# Altium PCB Test.PcbDoc
Units mil, origin at the board's own origin, x right, y up, seen from the top; angles counter-clockwise.
Board outline 6000 x 4000 mil, 2 copper layers (Top Layer, Bottom Layer); 78 components, 0 nets, 420 pads, 5 vias.
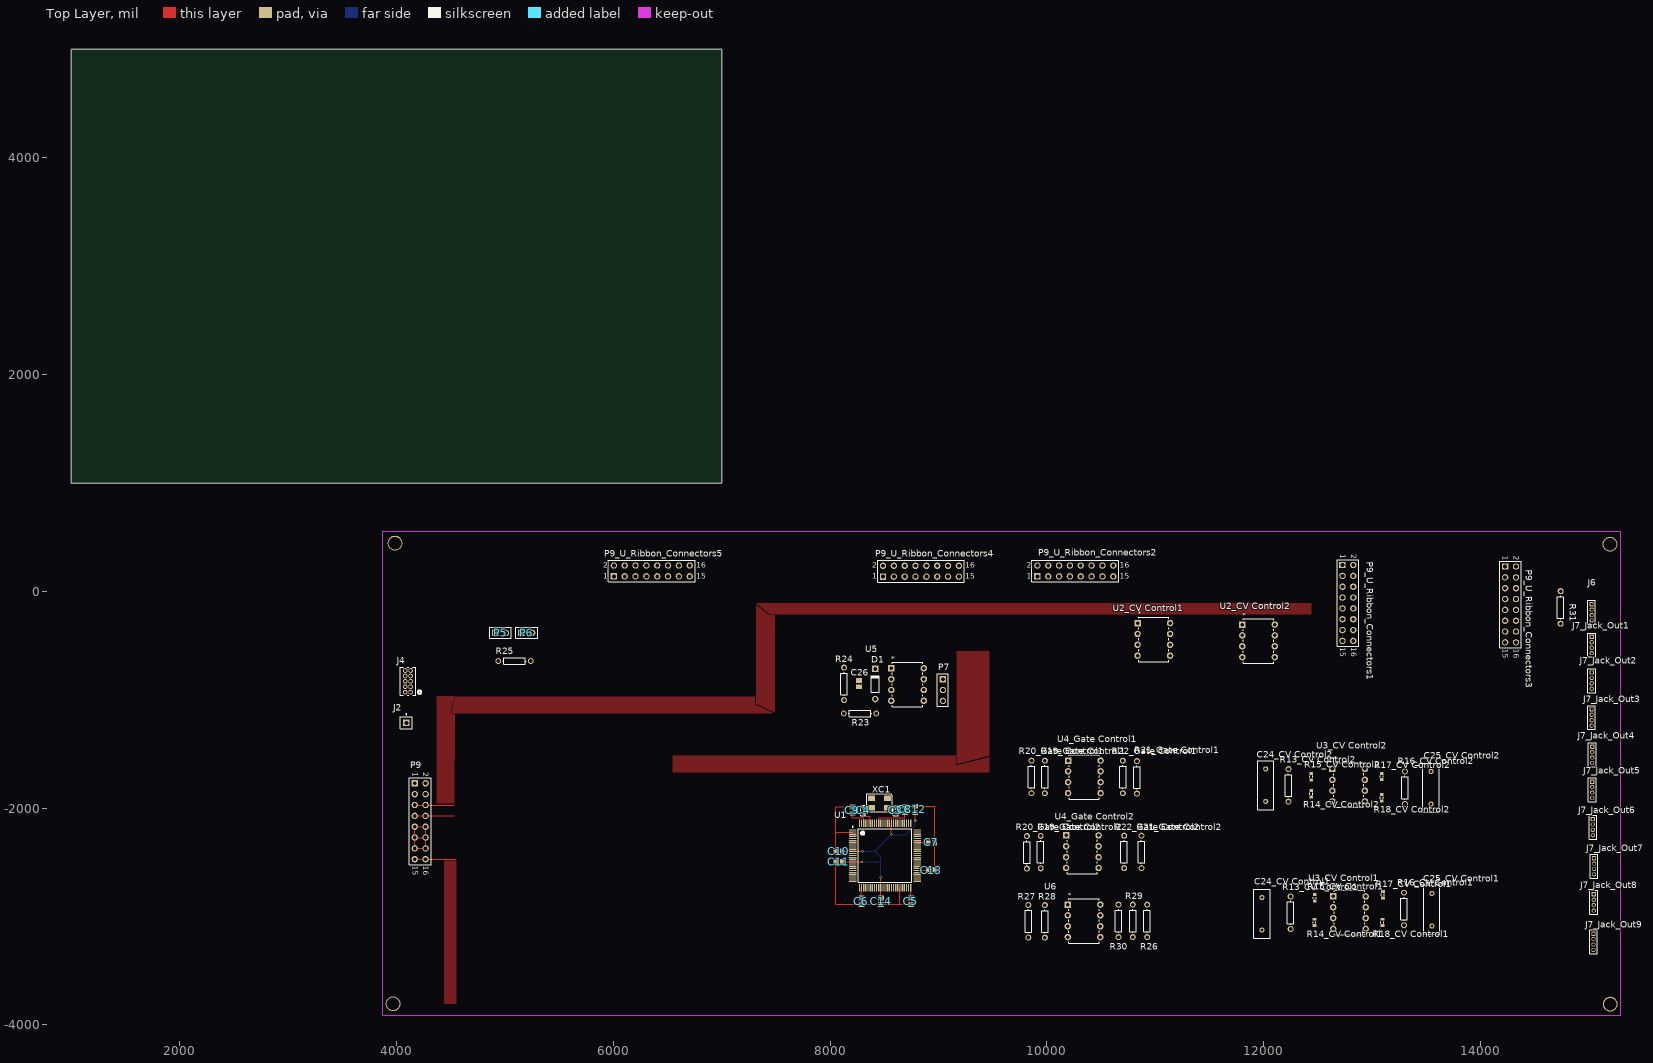
[diagram p0: Top Layer view]
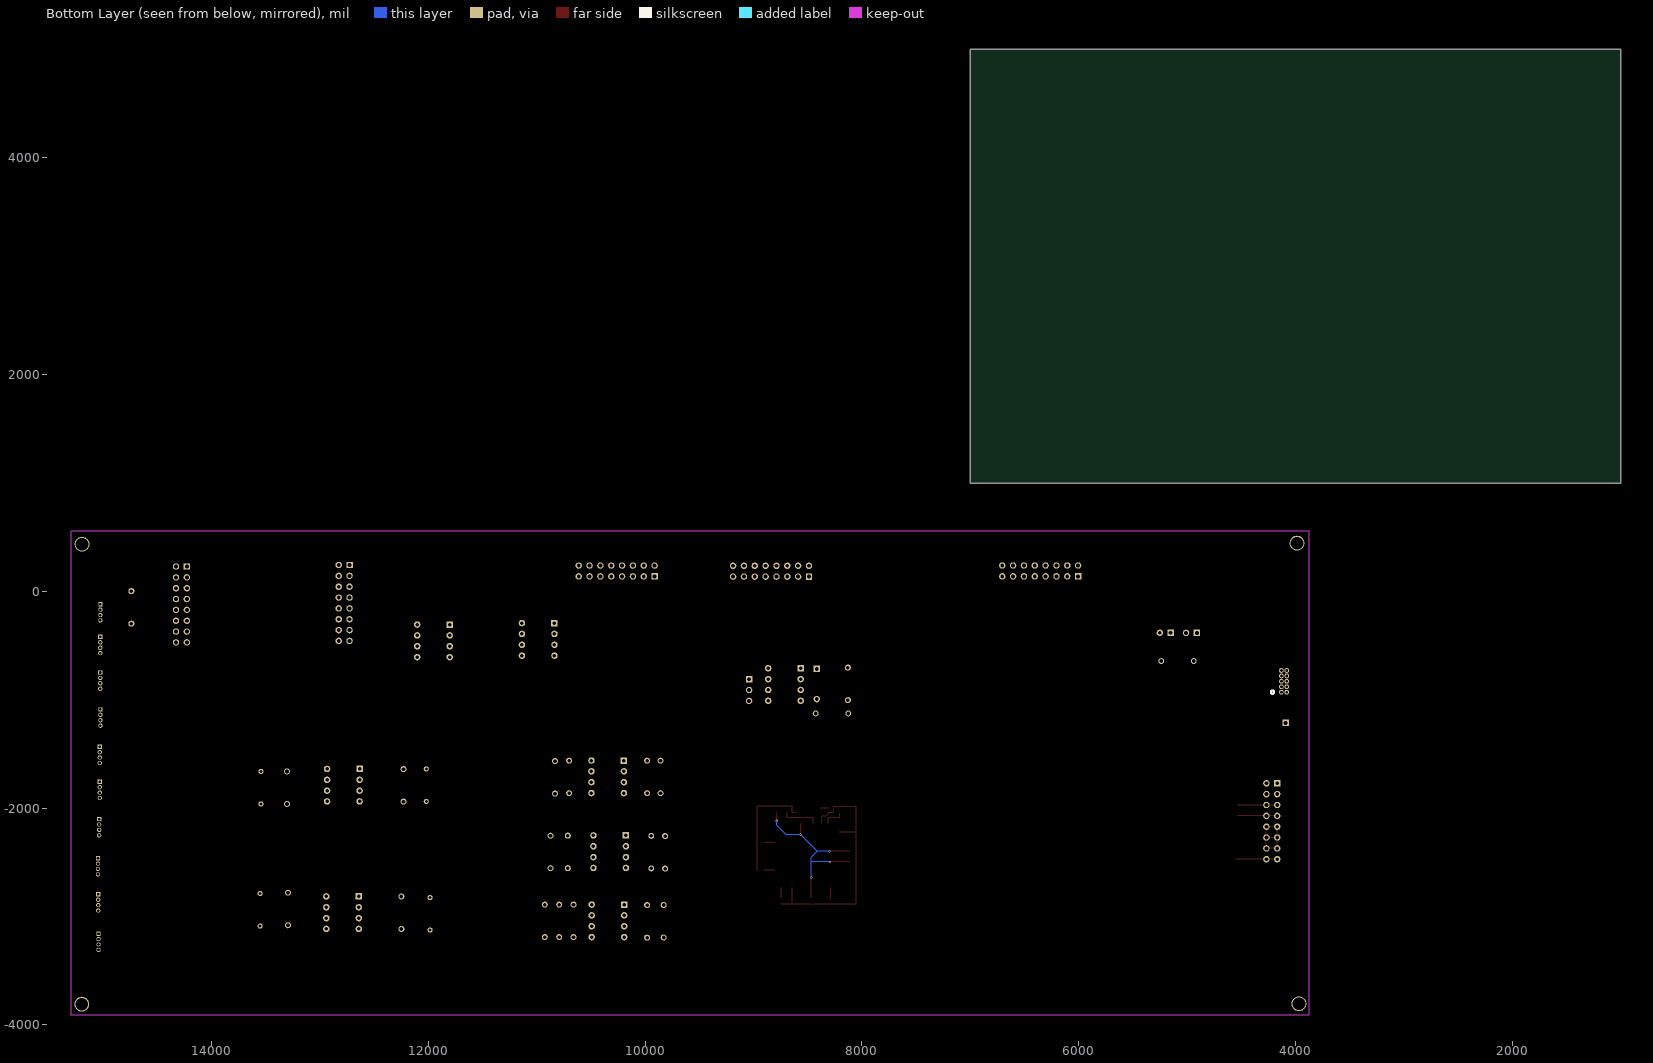
[diagram p1: Bottom Layer view, seen from below]

## Layer stack, top to bottom
Top Solder: solder mask 0.4, Solder Resist, Dk 3.5
Top Layer: signal copper 1.4
Dielectric 1: dielectric 12.6, FR-4, Dk 4.8
Bottom Layer: signal copper 1.4
Bottom Solder: solder mask 0.4, Solder Resist, Dk 3.5

## Board outline
1000,1000 7000,1000 7000,5000 1000,5000

## Design rules (kind name [scope] priority, off if disabled: settings)
Clearance [All] p1: gap=10
PolygonConnect [All] p1: connectstyle=Relief reliefconductorwidth=10 reliefentries=4 polygonreliefangle="90 Angle" airgapwidth=10
RoutingVias [All] p1: holewidth=28 width=50 viastyle="Through Hole" minholewidth=28 minwidth=50 maxholewidth=28 maxwidth=50
SolderMaskExpansion [All] p1: expansion=4
Width [All] p1: maxlimit=10 minlimit=10 preferedwidth=10
30 further rules are at their usual default settings.

## Components (designator, comment, footprint, x,y, rotation, side; value= is the part's Value field where it differs from the comment)
C3 "CAP-NONPOL" AP1-00001 8605.55,-2020.59 r270 top
C4 "CAP-NONPOL" AP1-00001 8303.39,-2020.59 r90 top
C5 "" C0805 8745.31,-2858.19 r90 top
C6 "" C0805 8288.62,-2858.19 r90 top
C7 "" C0805 8934.29,-2315.87 r180 top
C8 "" C0805 8688.23,-2011.73 r270 top
C9 "" C0805 8203.98,-2017.64 r270 top
C10 "" C0805 8080.94,-2397.56 r0 top
C11 "" C0805 8080.94,-2495.98 r0 top
C12 "" C0805 8784.68,-2011.73 r270 top
C13 "" C0805 8934.29,-2571.77 r180 top
C14 "" C0805 8469.72,-2858.19 r90 top
"C24_CV Control1" "Cap" RAD-0.3 11982.52,-2974.33 r90 top (schematic designator C24)
"C24_CV Control2" "Cap" RAD-0.3 12017.95,-1787.32 r270 top (schematic designator C24)
"C25_CV Control1" "Cap" RAD-0.3 13550.43,-2936.93 r270 top (schematic designator C25)
"C25_CV Control2" "Cap" RAD-0.3 13542.56,-1810.94 r270 top (schematic designator C25)
C26 "" C0805 8265.16,-851.38 r270 top
D1 "Diode 1N4148" DO-35 8415.59,-854.25 r90 top
J2 "Erase_Socket" PIN1 4089.8,-1212.52 r0 top
J4 "20021111-00010T4" CONN_MINITEK_2X5 4104.57,-829.65 r90 top
J6 "Phonejack3 RN" MHDR1X4 15023.86,-118.03 r270 top
J7_Jack_Out1 "Phonejack3 RN" MHDR1X4 15024.84,-419.21 r270 top (schematic designator J7)
J7_Jack_Out2 "Phonejack3 RN" MHDR1X4 15024.84,-747.95 r270 top (schematic designator J7)
J7_Jack_Out3 "Phonejack3 RN" MHDR1X4 15023.86,-1088.5 r270 top (schematic designator J7)
J7_Jack_Out4 "Phonejack3 RN" MHDR1X4 15029.76,-1432.99 r270 top (schematic designator J7)
J7_Jack_Out5 "Phonejack3 RN" MHDR1X4 15029.76,-1755.83 r270 top (schematic designator J7)
J7_Jack_Out6 "Phonejack3 RN" MHDR1X4 15035.67,-2100.31 r270 top (schematic designator J7)
J7_Jack_Out7 "Phonejack3 RN" MHDR1X4 15046.5,-2460.55 r270 top (schematic designator J7)
J7_Jack_Out8 "Phonejack3 RN" MHDR1X4 15044.53,-2794.21 r270 top (schematic designator J7)
J7_Jack_Out9 "Phonejack3 RN" MHDR1X4 15041.57,-3157.4 r270 top (schematic designator J7)
P5 "Header 2" HDR1X2 4908.7,-382.8 r0 top
P6 "Header 2" HDR1X2 5150.83,-381.81 r0 top
P7 "Header 3" HDR1X3 9039.77,-810.04 r270 top
P9 "Header 8X2" HDR2X8 4167.56,-1770.59 r270 top
P9_U_Ribbon_Connectors1 "Header 8X2" HDR2X8 12725.63,243.19 r270 top (schematic designator P9)
P9_U_Ribbon_Connectors2 "Header 8X2" HDR2X8 9911.46,138.27 r0 top (schematic designator P9)
P9_U_Ribbon_Connectors3 "Header 8X2" HDR2X8 14226.61,229.41 r270 top (schematic designator P9)
P9_U_Ribbon_Connectors4 "Header 8X2" HDR2X8 8487.24,136.3 r0 top (schematic designator P9)
P9_U_Ribbon_Connectors5 "Header 8X2" HDR2X8 6004.17,138.86 r0 top (schematic designator P9)
"R13_CV Control1" "Res1" AXIAL-0.3 12247.28,-2964.49 r90 top (schematic designator R13)
"R13_CV Control2" "Res1" AXIAL-0.3 12227.6,-1789.29 r270 top (schematic designator R13)
"R14_CV Control1" "Res3" J1-0603 12467.76,-3054.05 r270 top (schematic designator R14)
"R14_CV Control2" "Res3" J1-0603 12438.23,-1867.05 r270 top (schematic designator R14)
"R15_CV Control1" "Res3" J1-0603 12470.71,-2827.68 r270 top (schematic designator R15)
"R15_CV Control2" "Res3" J1-0603 12438.23,-1708.58 r270 top (schematic designator R15)
"R16_CV Control1" "Res1" AXIAL-0.3 13293.54,-2930.04 r270 top (schematic designator R16)
"R16_CV Control2" "Res1" AXIAL-0.3 13302.4,-1810.94 r270 top (schematic designator R16)
"R17_CV Control1" "Res3" J1-0603 13098.66,-2799.13 r270 top (schematic designator R17)
"R17_CV Control2" "Res3" J1-0603 13088.82,-1707.6 r90 top (schematic designator R17)
"R18_CV Control1" "Res3" J1-0603 13093.74,-3054.05 r270 top (schematic designator R18)
"R18_CV Control2" "Res3" J1-0603 13088.82,-1903.46 r270 top (schematic designator R18)
"R19_Gate Control1" "Res1" AXIAL-0.3 9980.55,-1711.54 r90 top (schematic designator R19)
"R19_Gate Control2" "Res1" AXIAL-0.3 9942.33,-2405.51 r90 top (schematic designator R19)
"R20_Gate Control1" "Res1" AXIAL-0.3 9856.54,-1711.54 r270 top (schematic designator R20)
"R20_Gate Control2" "Res1" AXIAL-0.3 9814.38,-2407.48 r270 top (schematic designator R20)
"R21_Gate Control1" "Res1" AXIAL-0.3 10829.96,-1715.47 r270 top (schematic designator R21)
"R21_Gate Control2" "Res1" AXIAL-0.3 10871.46,-2403.54 r270 top (schematic designator R21)
"R22_Gate Control1" "Res1" AXIAL-0.3 10700.04,-1711.54 r90 top (schematic designator R22)
"R22_Gate Control2" "Res1" AXIAL-0.3 10712.01,-2403.54 r90 top (schematic designator R22)
R23 "Res1" AXIAL-0.3 8275.01,-1125.98 r0 top
R24 "Res1" AXIAL-0.3 8128.35,-853.35 r270 top
R25 "R3" AXIAL-0.3 5087.83,-642.64 r0 top
R26 "Res1" AXIAL-0.3 10924.45,-3039.29 r270 top
R27 "Res1" AXIAL-0.3 9827.99,-3043.23 r270 top
R28 "Res1" AXIAL-0.3 9980.55,-3044.21 r90 top
R29 "Res1" AXIAL-0.3 10791.57,-3039.29 r270 top
R30 "Res1" AXIAL-0.3 10659.68,-3039.29 r270 top
R31 "Res1" AXIAL-0.3 14738.43,-147.56 r90 top
U1 "ATSAM4N16CA-AU" LQFP100_N 8506.14,-2436.93 r0 top net-tie
"U2_CV Control1" "LTC1661CN8#PBF" PDIP-8_N 11135.08,-592.44 r0 top (schematic designator U2)
"U2_CV Control2" "LTC1661CN8#PBF" PDIP-8_N 12101.61,-606.22 r0 top (schematic designator U2)
"U3_CV Control1" "LT1632CN8#PBF" PDIP-8_N 12940.2,-3114.09 r0 top (schematic designator U3)
"U3_CV Control2" "LT1632CN8#PBF" PDIP-8_N 12933.31,-1937.91 r0 top (schematic designator U3)
"U4_Gate Control1" "LT1632CN8#PBF" PDIP-8_N 10494.33,-1860.16 r0 top (schematic designator U4)
"U4_Gate Control2" "LT1632CN8#PBF" PDIP-8_N 10475.79,-2551.18 r0 top (schematic designator U4)
U5 "LT1632CN8#PBF" PDIP-8_N 8863.58,-1009.45 r0 top
U6 "LT1632CN8#PBF" PDIP-8_N 10492.36,-3188.9 r0 top
XC1 "12.0MHz" AP7-00039 8454.96,-1951.69 r180 top

## Footprints (in the part's own frame and the unit in brackets; to place one, negate y for a bottom-side part, rotate by r counter-clockwise, add the part's x,y. Pads: shape width x height; smd on the part's side, far side on the other; paste and mask are expansions set on the pad)
AP1-00001 [mm]
  rect 0.9x0.6 smd: 1(-0.55,0) 2(0.55,0)
  silkscreen extent -1.25,-0.55 1.25,0.55, body extent -0.5,-0.3 0.5,0.3, height 0.2
AP7-00039 [mm]
  rect 1.6x1.3 smd: 1(-1.9,-1.15) 2(1.9,-1.15) 3(1.9,1.15) 4(-1.9,1.15)
  silkscreen extent -3,-2.1 3,2.1, body extent -2.7,-1.8 2.7,1.8, height 1.2
AXIAL-0.3 [mm] "Axial Device, Thru-Hole; 2 Leads; 0.3 in Pin Spacing"
  round 1.4 hole 0.85: 1(-3.81,0) 2(3.81,0)
  silkscreen extent -2.77,-0.76 2.77,0.76
C0805 [mm] "Chip Capacitor, Body 2.0x1.3mm, IPC High Density"
  rect 1.1x1.4 smd: 1(-0.75,0) 2(0.75,0)
  body extent -1.1,-0.72 1.1,0.72, height 1.4
CONN_MINITEK_2X5 [mil]
  round 44 / inner round 60 / far side round 44 hole 26: 1(-100,-25) 2(-100,25) 3(-50,-25) 4(-50,25) 5(0,-25) 6(0,25) 7(50,-25) 8(50,25) 9(100,-25) 10(100,25)
  silkscreen extent -130,-122 130,73, body extent 0,0 10,10, height 10
DO-35 [mm] "Diode, Axial; Body 3.8 x 1.9 mm (LxDia. max), Lead Dia. 0.53 mm (max)"
  round 1.5 hole 0.9: 1(-3.55,0)
  rect 1.5x1.5 hole 0.9: 2(3.55,0)
  silkscreen extent -1.95,-0.95 2.05,0.95
HDR1X2 [mm] "Connector; Header; 2 Position"
  rect 1.5x1.5 hole 0.9: 1(0,0)
  round 1.5 hole 0.9: 2(2.54,0)
  silkscreen extent -1.27,-1.27 3.81,1.27
HDR1X3 [mm] "Connector; Header; 3 Position"
  rect 1.5x1.5 hole 0.9: 1(0,0)
  round 1.5 hole 0.9: 2(2.54,0) 3(5.08,0)
  silkscreen extent -1.27,-1.27 6.35,1.27
HDR2X8 [mm] "Connector; Header; 8x2 Position"
  rect 1.5x1.5 hole 0.9: 1(0,0)
  round 1.5 hole 0.9: 2(0,2.54) 3(2.54,0) 4(2.54,2.54) 5(5.08,0) 6(5.08,2.54) 7(7.62,0) 8(7.62,2.54) 9(10.16,0) 10(10.16,2.54) 11(12.7,0) 12(12.7,2.54) 13(15.24,0) 14(15.24,2.54) 15(17.78,0) 16(17.78,2.54)
  silkscreen extent -1.27,-1.27 19.05,3.81
J1-0603 [mm] "Chip Resistor, Body 1.6x0.8mm, IPC High Density"
  rect 0.7x0.9 smd: 1(-0.75,0) 2(0.75,0)
  silkscreen extent -0.2,-0.35 0.2,0.35, body extent -0.85,-0.48 0.85,0.48, height 0.9
LQFP100_N [mm] "Thin QFP, 100-Leads, Body 14x14mm, Pitch 0.5mm, IPC Medium Density"
  oval 1.8x0.3 smd: 1(-7.55,6) 2(-7.55,5.5) 3(-7.55,5) 4(-7.55,4.5) 5(-7.55,4) 6(-7.55,3.5) 7(-7.55,3) 8(-7.55,2.5) 9(-7.55,2) 10(-7.55,1.5) 11(-7.55,1) 12(-7.55,0.5) 13(-7.55,0) 14(-7.55,-0.5) 15(-7.55,-1) 16(-7.55,-1.5) 17(-7.55,-2) 18(-7.55,-2.5) 19(-7.55,-3) 20(-7.55,-3.5) 21(-7.55,-4) 22(-7.55,-4.5) 23(-7.55,-5) 24(-7.55,-5.5) 25(-7.55,-6) 51(7.55,-6) 52(7.55,-5.5) 53(7.55,-5) 54(7.55,-4.5) 55(7.55,-4) 56(7.55,-3.5) 57(7.55,-3) 58(7.55,-2.5) 59(7.55,-2) 60(7.55,-1.5) 61(7.55,-1) 62(7.55,-0.5) 63(7.55,0) 64(7.55,0.5) 65(7.55,1) 66(7.55,1.5) 67(7.55,2) 68(7.55,2.5) 69(7.55,3) 70(7.55,3.5) 71(7.55,4) 72(7.55,4.5) 73(7.55,5) 74(7.55,5.5) 75(7.55,6)
  oval 0.3x1.8 smd: 26(-6,-7.55) 27(-5.5,-7.55) 28(-5,-7.55) 29(-4.5,-7.55) 30(-4,-7.55) 31(-3.5,-7.55) 32(-3,-7.55) 33(-2.5,-7.55) 34(-2,-7.55) 35(-1.5,-7.55) 36(-1,-7.55) 37(-0.5,-7.55) 38(0,-7.55) 39(0.5,-7.55) 40(1,-7.55) 41(1.5,-7.55) 42(2,-7.55) 43(2.5,-7.55) 44(3,-7.55) 45(3.5,-7.55) 46(4,-7.55) 47(4.5,-7.55) 48(5,-7.55) 49(5.5,-7.55) 50(6,-7.55) 76(6,7.55) 77(5.5,7.55) 78(5,7.55) 79(4.5,7.55) 80(4,7.55) 81(3.5,7.55) 82(3,7.55) 83(2.5,7.55) 84(2,7.55) 85(1.5,7.55) 86(1,7.55) 87(0.5,7.55) 88(0,7.55) 89(-0.5,7.55) 90(-1,7.55) 91(-1.5,7.55) 92(-2,7.55) 93(-2.5,7.55) 94(-3,7.55) 95(-3.5,7.55) 96(-4,7.55) 97(-4.5,7.55) 98(-5,7.55) 99(-5.5,7.55) 100(-6,7.55)
  silkscreen extent -7.67,-6.25 6.25,6.82, body extent -7,-7 7,7, height 1.6
MHDR1X4 [mm] "Connector; Header; 4 Position"
  rect 1x1 hole 0.6: 1(0,0)
  round 1 hole 0.6: 2(1.27,0) 3(2.54,0) 4(3.81,0)
  silkscreen extent -0.9,-0.9 4.71,0.9
PDIP-8_N [mil]
  rect 60x60 / inner round 60 / far side rect 60x60 hole 32 paste+0 mask+0: 1(-300,300)
  round 60 hole 32 paste+0 mask+0: 2(-300,200) 3(-300,100) 4(-300,0) 5(0,0) 6(0,100) 7(0,200) 8(0,300)
  silkscreen extent -290,-55 -10,355, body extent 0,0 10,10, height 10
PIN1 [mm] "Connector; Plug"
  rect 1.5x1.5 hole 0.9: 1(0,0)
  silkscreen extent -1.4,-1.4 1.4,2.17
RAD-0.3 [mm] "Radial Cap, Thru-Hole; 2 Leads; 0.3 in Pin Spacing"
  round 1.2 hole 0.7: 1(-3.81,0) 2(3.81,0)
  silkscreen extent -5.71,-1.91 5.71,1.91

## Part data
C3 C4: library part A01-0019, "Ceramic capacitor, SMD 0402, NP0, 50V, +/-5%"
C5 C6 C7 C8 C9 C10 C11 C12 C13 C14 C26: library part Cap, "Capacitor"
"C24_CV Control1" "C24_CV Control2" "C25_CV Control1" "C25_CV Control2": "Capacitor"
D1: "High Conductance Fast Diode"
J2: library part Socket, "Socket"
J4 "U2_CV Control1" "U2_CV Control2" "U3_CV Control1" "U3_CV Control2" "U4_Gate Control1" "U4_Gate Control2" U5 U6: "Imported"
J6 J7_Jack_Out1 J7_Jack_Out2 J7_Jack_Out3 J7_Jack_Out4 J7_Jack_Out5 J7_Jack_Out6 J7_Jack_Out7 J7_Jack_Out8 J7_Jack_Out9: "Jack Socket, 1/4\" [6.5mm], Thru-Hole, Vertical, 3-Conductor with Tip open & Ring closed"
P5 P6: "Header, 2-Pin"
P7: "Header, 3-Pin"
P9 P9_U_Ribbon_Connectors1 P9_U_Ribbon_Connectors2 P9_U_Ribbon_Connectors3 P9_U_Ribbon_Connectors4 P9_U_Ribbon_Connectors5: "Header, 8-Pin, Dual row"
"R13_CV Control1" "R13_CV Control2" "R14_CV Control1" "R14_CV Control2" "R15_CV Control1" "R15_CV Control2" "R16_CV Control1" "R16_CV Control2" "R17_CV Control1" "R17_CV Control2" "R18_CV Control1" "R18_CV Control2" "R19_Gate Control1" "R19_Gate Control2" "R20_Gate Control1" "R20_Gate Control2" "R21_Gate Control1" "R21_Gate Control2" "R22_Gate Control1" "R22_Gate Control2" R23 R24 R26 R27 R28 R29 R30 R31: "Resistor"
R25: library part Res1, "Resistor"
U1: library part ATSAM4S16CA-AU, "AT91 ARM Cortex-M4 32-bit Microcontroller, 1MB Flash, 128KB SRAM, USB, 79 User I/Os, 100-Pin LQFP, Industrial Grade (-40°C to 105°C), Pb-Free"
XC1: library part A07-0042, "Fox FQ5032B 12.0MHz SMD crystal 738B-12"

## Free pads (board coordinates)
  round 137.8 hole 118.11: 2(3967.76,-3804.06) 2(3985.47,444.96) 2(15193.15,435.12) 2(15196.1,-3807.99)

## Via types
v1: diameter 21.65, hole 9.84, Top Layer to Bottom Layer, 5 vias

## Nets (pads, with @x,y where several pads share a name; then routed paths per layer and width w, separated by ;. In a path a pad name is that pad's centre, name@x,y a point inside that pad or via, vN(x,y) a via of type N, cw(c..) or ccw(c..) an arc to the next point about the centre after c; other vN are vias at no path point)
pads on no net: "C24_CV Control1.1" "C24_CV Control1.2" "C24_CV Control2.1" "C24_CV Control2.2" "C25_CV Control1.1" "C25_CV Control1.2" "C25_CV Control2.1" "C25_CV Control2.2" "R13_CV Control1.1" "R13_CV Control1.2" "R13_CV Control2.1" "R13_CV Control2.2" "R14_CV Control1.1" "R14_CV Control1.2" "R14_CV Control2.1" "R14_CV Control2.2" "R15_CV Control1.1" "R15_CV Control1.2" "R15_CV Control2.1" "R15_CV Control2.2" "R16_CV Control1.1" "R16_CV Control1.2" "R16_CV Control2.1" "R16_CV Control2.2" "R17_CV Control1.1" "R17_CV Control1.2" "R17_CV Control2.1" "R17_CV Control2.2" "R18_CV Control1.1" "R18_CV Control1.2" "R18_CV Control2.1" "R18_CV Control2.2" "R19_Gate Control1.1" "R19_Gate Control1.2" "R19_Gate Control2.1" "R19_Gate Control2.2" "R20_Gate Control1.1" "R20_Gate Control1.2" "R20_Gate Control2.1" "R20_Gate Control2.2" "R21_Gate Control1.1" "R21_Gate Control1.2" "R21_Gate Control2.1" "R21_Gate Control2.2" "R22_Gate Control1.1" "R22_Gate Control1.2" "R22_Gate Control2.1" "R22_Gate Control2.2" "U2_CV Control1.1" "U2_CV Control1.2" "U2_CV Control1.3" "U2_CV Control1.4" "U2_CV Control1.5" "U2_CV Control1.6" "U2_CV Control1.7" "U2_CV Control1.8" "U2_CV Control2.1" "U2_CV Control2.2" "U2_CV Control2.3" "U2_CV Control2.4" "U2_CV Control2.5" "U2_CV Control2.6" "U2_CV Control2.7" "U2_CV Control2.8" "U3_CV Control1.1" "U3_CV Control1.2" "U3_CV Control1.3" "U3_CV Control1.4" "U3_CV Control1.5" "U3_CV Control1.6" "U3_CV Control1.7" "U3_CV Control1.8" "U3_CV Control2.1" "U3_CV Control2.2" "U3_CV Control2.3" "U3_CV Control2.4" "U3_CV Control2.5" "U3_CV Control2.6" "U3_CV Control2.7" "U3_CV Control2.8" "U4_Gate Control1.1" "U4_Gate Control1.2" "U4_Gate Control1.3" "U4_Gate Control1.4" "U4_Gate Control1.5" "U4_Gate Control1.6" "U4_Gate Control1.7" "U4_Gate Control1.8" "U4_Gate Control2.1" "U4_Gate Control2.2" "U4_Gate Control2.3" "U4_Gate Control2.4" "U4_Gate Control2.5" "U4_Gate Control2.6" "U4_Gate Control2.7" "U4_Gate Control2.8" C3.1 C3.2 C4.1 C4.2 C5.1 C5.2 C6.1 C6.2 C7.1 C7.2 C8.1 C8.2 C9.1 C9.2 C10.1 C10.2 C11.1 C11.2 C12.1 C12.2 C13.1 C13.2 C14.1 C14.2 C26.1 C26.2 D1.1 D1.2 J2.1 J4.1 J4.2 J4.3 J4.4 J4.5 J4.6 J4.7 J4.8 J4.9 J4.10 J6.1 J6.2 J6.3 J6.4 J7_Jack_Out1.1 J7_Jack_Out1.2 J7_Jack_Out1.3 J7_Jack_Out1.4 J7_Jack_Out2.1 J7_Jack_Out2.2 J7_Jack_Out2.3 J7_Jack_Out2.4 J7_Jack_Out3.1 J7_Jack_Out3.2 J7_Jack_Out3.3 J7_Jack_Out3.4 J7_Jack_Out4.1 J7_Jack_Out4.2 J7_Jack_Out4.3 J7_Jack_Out4.4 J7_Jack_Out5.1 J7_Jack_Out5.2 J7_Jack_Out5.3 J7_Jack_Out5.4 J7_Jack_Out6.1 J7_Jack_Out6.2 J7_Jack_Out6.3 J7_Jack_Out6.4 J7_Jack_Out7.1 J7_Jack_Out7.2 J7_Jack_Out7.3 J7_Jack_Out7.4 J7_Jack_Out8.1 J7_Jack_Out8.2 J7_Jack_Out8.3 J7_Jack_Out8.4 J7_Jack_Out9.1 J7_Jack_Out9.2 J7_Jack_Out9.3 J7_Jack_Out9.4 P5.1 P5.2 P6.1 P6.2 P7.1 P7.2 P7.3 P9.1 P9.2 P9.3 P9.4 P9.5 P9.6 P9.7 P9.8 P9.9 P9.10 P9.11 P9.12 P9.13 P9.14 P9.15 P9.16 P9_U_Ribbon_Connectors1.1 P9_U_Ribbon_Connectors1.2 P9_U_Ribbon_Connectors1.3 P9_U_Ribbon_Connectors1.4 P9_U_Ribbon_Connectors1.5 P9_U_Ribbon_Connectors1.6 P9_U_Ribbon_Connectors1.7 P9_U_Ribbon_Connectors1.8 P9_U_Ribbon_Connectors1.9 P9_U_Ribbon_Connectors1.10 P9_U_Ribbon_Connectors1.11 P9_U_Ribbon_Connectors1.12 P9_U_Ribbon_Connectors1.13 P9_U_Ribbon_Connectors1.14 P9_U_Ribbon_Connectors1.15 P9_U_Ribbon_Connectors1.16 P9_U_Ribbon_Connectors2.1 P9_U_Ribbon_Connectors2.2 P9_U_Ribbon_Connectors2.3 P9_U_Ribbon_Connectors2.4 P9_U_Ribbon_Connectors2.5 P9_U_Ribbon_Connectors2.6 P9_U_Ribbon_Connectors2.7 P9_U_Ribbon_Connectors2.8 P9_U_Ribbon_Connectors2.9 P9_U_Ribbon_Connectors2.10 P9_U_Ribbon_Connectors2.11 P9_U_Ribbon_Connectors2.12 P9_U_Ribbon_Connectors2.13 P9_U_Ribbon_Connectors2.14 P9_U_Ribbon_Connectors2.15 P9_U_Ribbon_Connectors2.16 P9_U_Ribbon_Connectors3.1 P9_U_Ribbon_Connectors3.2 P9_U_Ribbon_Connectors3.3 P9_U_Ribbon_Connectors3.4 P9_U_Ribbon_Connectors3.5 P9_U_Ribbon_Connectors3.6 P9_U_Ribbon_Connectors3.7 P9_U_Ribbon_Connectors3.8 P9_U_Ribbon_Connectors3.9 P9_U_Ribbon_Connectors3.10 P9_U_Ribbon_Connectors3.11 P9_U_Ribbon_Connectors3.12 P9_U_Ribbon_Connectors3.13 P9_U_Ribbon_Connectors3.14 P9_U_Ribbon_Connectors3.15 P9_U_Ribbon_Connectors3.16 P9_U_Ribbon_Connectors4.1 P9_U_Ribbon_Connectors4.2 P9_U_Ribbon_Connectors4.3 P9_U_Ribbon_Connectors4.4 P9_U_Ribbon_Connectors4.5 P9_U_Ribbon_Connectors4.6 P9_U_Ribbon_Connectors4.7 P9_U_Ribbon_Connectors4.8 P9_U_Ribbon_Connectors4.9 P9_U_Ribbon_Connectors4.10 P9_U_Ribbon_Connectors4.11 P9_U_Ribbon_Connectors4.12 P9_U_Ribbon_Connectors4.13 P9_U_Ribbon_Connectors4.14 P9_U_Ribbon_Connectors4.15 P9_U_Ribbon_Connectors4.16 P9_U_Ribbon_Connectors5.1 P9_U_Ribbon_Connectors5.2 P9_U_Ribbon_Connectors5.3 P9_U_Ribbon_Connectors5.4 P9_U_Ribbon_Connectors5.5 P9_U_Ribbon_Connectors5.6 P9_U_Ribbon_Connectors5.7 P9_U_Ribbon_Connectors5.8 P9_U_Ribbon_Connectors5.9 P9_U_Ribbon_Connectors5.10 P9_U_Ribbon_Connectors5.11 P9_U_Ribbon_Connectors5.12 P9_U_Ribbon_Connectors5.13 P9_U_Ribbon_Connectors5.14 P9_U_Ribbon_Connectors5.15 P9_U_Ribbon_Connectors5.16 R23.1 R23.2 R24.1 R24.2 R25.1 R25.2 R26.1 R26.2 R27.1 R27.2 R28.1 R28.2 R29.1 R29.2 R30.1 R30.2 R31.1 R31.2 U1.1 U1.2 U1.3 U1.4 U1.5 U1.6 U1.7 U1.8 U1.9 U1.10 U1.11 U1.12 U1.13 U1.14 U1.15 U1.16 U1.17 U1.18 U1.19 U1.20 U1.21 U1.22 U1.23 U1.24 U1.25 U1.26 U1.27 U1.28 U1.29 U1.30 U1.31 U1.32 U1.33 U1.34 U1.35 U1.36 U1.37 U1.38 U1.39 U1.40 U1.41 U1.42 U1.43 U1.44 U1.45 U1.46 U1.47 U1.48 U1.49 U1.50 U1.51 U1.52 U1.53 U1.54 U1.55 U1.56 U1.57 U1.58 U1.59 U1.60 U1.61 U1.62 U1.63 U1.64 U1.65 U1.66 U1.67 U1.68 U1.69 U1.70 U1.71 U1.72 U1.73 U1.74 U1.75 U1.76 U1.77 U1.78 U1.79 U1.80 U1.81 U1.82 U1.83 U1.84 U1.85 U1.86 U1.87 U1.88 U1.89 U1.90 U1.91 U1.92 U1.93 U1.94 U1.95 U1.96 U1.97 U1.98 U1.99 U1.100 U5.1 U5.2 U5.3 U5.4 U5.5 U5.6 U5.7 U5.8 U6.1 U6.2 U6.3 U6.4 U6.5 U6.6 U6.7 U6.8 XC1.1 XC1.2 XC1.3 XC1.4
copper on no net: | length 7953.5
  Top Layer w10: 4167.56,-2470.59 4267.56,-2470.59 4548.55,-2470.59 ; 4167.56,-2270.59 4167.56,-2170.59 4267.56,-2170.59 4267.56,-2270.59 ; 4167.56,-2070.59 4267.56,-2070.59 4532.52,-2070.59 ; 4167.56,-1970.59 4267.56,-1970.59 4527.3,-1970.59 4532.72,-1965.18 ; 8051.42,-2493.03 8051.42,-2887.72 8288.62,-2887.72 8452.01,-2887.72 8460.87,-2896.57 ; 8052.4,-2492.05 8052.4,-2220.39 ; 8110.47,-2495.98 8207.91,-2495.98 ; 8110.47,-2397.56 8208.9,-2397.56 v1(8298.46,-2397.56) ; 8203.98,-2047.17 8203.98,-2086.54 8307.32,-2086.54 8309.29,-2088.5 8309.29,-2139.69 ; 8208.9,-2495.98 v1(8293.54,-2495.98) ; 8208.9,-2220.39 8052.4,-2220.39 ; 8258.11,-1988.11 8203.98,-1988.11 8052.4,-1988.11 8052.4,-2220.39 ; 8259.09,-1988.11 8259.09,-2042.24 8303.39,-2042.24 8334.88,-2073.74 8368.35,-2073.74 8368.35,-2139.68 ; 8288.62,-2828.66 8288.62,-2735.16 ; 8303.39,-1998.94 8378.19,-1998.94 8380.16,-1996.97 ; 8448.07,-2138.7 8448.07,-2088.5 8688.23,-2088.5 8688.23,-2041.26 ; 8466.77,-2825.71 8466.77,-2734.17 v1(8466.77,-2638.7) ; 8469.65,-2828.58 8469.72,-2828.66 ; 8469.72,-2887.72 8745.31,-2887.72 ; v1(8565.2,-2243.03) 8565.2,-2139.69 ; 8605.55,-2042.24 8640.98,-2042.24 8640.98,-1981.22 8957.91,-1981.22 8962.83,-1986.14 8962.83,-2314.88 ; 8643.94,-2887.72 8643.94,-2734.17 ; 8742.36,-2825.71 8742.36,-2734.17 ; v1(8784.68,-2117.05) 8784.68,-2041.26 ; 8803.39,-2574.72 8901.81,-2574.72 ; 8803.39,-2318.82 8901.81,-2318.82 ; 8963.82,-2571.77 8963.82,-2315.87 ; 4267.56,-2270.59 4267.56,-2370.59 4167.56,-2370.59 4167.56,-2277.48 4174.45,-2270.59 4267.56,-2270.59
  Bottom Layer w10: v1(8293.54,-2495.98) 8466.77,-2495.98 ; v1(8298.46,-2397.56) 8410.67,-2397.56 ; v1(8466.77,-2638.7) 8466.77,-2453.66 8410.67,-2397.56 ; v1(8784.68,-2117.05) 8784.68,-2157.4 8699.06,-2243.03 v1(8565.2,-2243.03) 8410.67,-2397.56

## Polygon pours and split planes (outlines as drawn)
no net on Top Layer "3.3V" (solid, pour order 12): 6547.48,-1517.64 6547.48,-1670.2 9468.74,-1670.2 9468.74,-1656.42 9468.74,-1517.64 8019.92,-1517.64
no net on Top Layer "3.3V" (solid, pour order 10): 9468.74,-1517.64 9468.74,-557.99 9464.8,-554.06 9460.87,-550.12 9169.53,-550.12 9169.53,-1582.6 9155.75,-1596.38
no net on Top Layer "5V" (solid, pour order 8): 4370.32,-1971.67 4370.32,-970.69 4375.24,-965.77 4539.62,-965.77 4532.72,-1971.67 4539.61,-1969.7 4462.83,-1969.7
no net on Top Layer "5V" (solid, pour order 6): 4538.29,-972.36 7486.46,-972.36 7486.46,-1110.16 7490.39,-1114.09 7482.52,-1121.97 4505.16,-1121.97
no net on Top Layer "5V" (solid, pour order 4): 7486.42,-1118.07 7486.42,-119.05 7489.41,-116.06 7483.5,-110.16 7316.18,-110.16 7316.18,-1019.61 7306.34,-1029.45
no net on Top Layer "5V" (solid, pour order 2): 7316.18,-110.16 12437.24,-110.16 12437.24,-210.55 12434.29,-213.5 12431.34,-210.55 7443.15,-210.55
no net on Top Layer "-12V" (solid, pour order 0): 4440.98,-2470.59 4440.98,-3800.91 4444.13,-3804.06 4445.12,-3805.04 4550.43,-3805.04 4550.43,-2476.3 4544.53,-2470.39

## Keep-outs
Keep-Out Layer:
  lines w10: 3874.25,-3909.37 3874.25,555.2 15291.57,555.2 15291.57,-3909.37 3874.25,-3909.37

## Text inside footprints (layer, text, board x,y; h text height)
P9: Top Overlay "2" at 4247.56,-1670.59 h50 r270; Top Overlay "1" at 4147.56,-1670.59 h50 r270; Top Overlay "15" at 4147.56,-2530.59 h50 r270; Top Overlay "16" at 4247.56,-2530.59 h50 r270
P9_U_Ribbon_Connectors1: Top Overlay "2" at 12805.63,343.19 h50 r270; Top Overlay "1" at 12705.63,343.19 h50 r270; Top Overlay "15" at 12705.63,-516.81 h50 r270; Top Overlay "16" at 12805.63,-516.81 h50 r270
P9_U_Ribbon_Connectors2: Top Overlay "16" at 10671.46,218.27 h50; Top Overlay "15" at 10671.46,118.27 h50; Top Overlay "1" at 9811.46,118.27 h50; Top Overlay "2" at 9811.46,218.27 h50
P9_U_Ribbon_Connectors3: Top Overlay "16" at 14306.61,-530.59 h50 r270; Top Overlay "15" at 14206.61,-530.59 h50 r270; Top Overlay "1" at 14206.61,329.41 h50 r270; Top Overlay "2" at 14306.61,329.41 h50 r270
P9_U_Ribbon_Connectors4: Top Overlay "16" at 9247.24,216.3 h50; Top Overlay "15" at 9247.24,116.3 h50; Top Overlay "1" at 8387.24,116.3 h50; Top Overlay "2" at 8387.24,216.3 h50
P9_U_Ribbon_Connectors5: Top Overlay "16" at 6764.17,218.86 h50; Top Overlay "15" at 6764.17,118.86 h50; Top Overlay "1" at 5904.17,118.86 h50; Top Overlay "2" at 5904.17,218.86 h50
"U2_CV Control1": Top Overlay "*" at 10835.08,-232.44 h50; Mechanical 13 "*" at 10860.08,-292.44 h50
"U2_CV Control2": Top Overlay "*" at 11801.61,-246.22 h50; Mechanical 13 "*" at 11826.61,-306.22 h50
"U3_CV Control1": Top Overlay "*" at 12640.2,-2754.09 h50; Mechanical 13 "*" at 12665.2,-2814.09 h50
"U3_CV Control2": Top Overlay "*" at 12633.31,-1577.91 h50; Mechanical 13 "*" at 12658.31,-1637.91 h50
"U4_Gate Control1": Top Overlay "*" at 10194.33,-1500.16 h50; Mechanical 13 "*" at 10219.33,-1560.16 h50
"U4_Gate Control2": Top Overlay "*" at 10175.79,-2191.18 h50; Mechanical 13 "*" at 10200.79,-2251.18 h50
U5: Top Overlay "*" at 8563.58,-649.45 h50; Mechanical 13 "*" at 8588.58,-709.45 h50
U6: Top Overlay "*" at 10192.36,-2828.9 h50; Mechanical 13 "*" at 10217.36,-2888.9 h50